# EAGLE board RPi_pico (EAGLE 7.7.0)

No outline drawn. Coordinates in mm, seen from the top.
Copper layers (1*16): Top 0.035mm / dielectric 1.5mm / Bottom 0.035mm
Design rules "default": minimum track width 10mil, minimum drill 24mil, track to track 8mil, track to pad 8mil, pad to pad 8mil, via to via 8mil, smd to smd 8mil, copper to edge 40mil, drill to drill 8mil, minimum pad ring 10mil, minimum via ring 8mil, stop-mask expansion 4mil, vias tented up to drill 0mil, thermal gap 10mil

## Footprints (pad centres in the part's own frame; a part is rotated, then mirrored left to right if it is on the bottom)
DIP40-W = drill 1 offset: 3V3_EN 19.38,41.94; 3V3OUT 19.38,39.4; !RESET 19.38,24.16; AREF 19.38,36.86; GND 1.6,44.48; GND@1 1.6,31.78; GND@2 1.6,19.08; GND@3 1.6,6.38; GND@4 19.38,6.38; GND@5 19.38,19.08; GND@6 19.38,31.78; GND@7 19.38,44.48; GND@DEBUG 10.49,1.3; GP0 1.6,49.56; GP1 1.6,47.02; GP2 1.6,41.94; GP3 1.6,39.4; GP4 1.6,36.86; GP5 1.6,34.32; GP6 1.6,29.24; GP7 1.6,26.7; GP8 1.6,24.16; GP9 1.6,21.62; GP10 1.6,16.54; GP11 1.6,14; GP12 1.6,11.46; GP13 1.6,8.92; GP14 1.6,3.84; GP15 1.6,1.3; GP16 19.38,1.3; GP17 19.38,3.84; GP18 19.38,8.92; GP19 19.38,11.46; GP20 19.38,14; GP21 19.38,16.54; GP22 19.38,21.62; GP26 19.38,26.7; GP27 19.38,29.24; GP28 19.38,34.32; SWCLK 7.95,1.3; SWDIO 13.03,1.3; VBUS 19.38,49.56; VSYS 19.38,47.02 | hole 2.1: 4.8,2; 16.2,2; 4.8,49.1; 16.1,49

## Placement (x,y rotation side)
E$1  [DIP40-W]  0,1.27 0 top

## Library data of the parts
E$1 = RPi_pico

## Text on the board
tPlace: vBus | vSys | GND | GND | 3v3out | ARef | A2 | GND | GND | A1 | A0 | !Reset | GND | GND | GND | GND
tNames: Boot
tplaceG: 0 | 1 | 2 | 3 | 4 | 5 | 28 | 6 | 27 | 7 | 26 | 8 | 9 | 22 | 10 | 21 | 11 | 20 | 12 | 19 | 13 | 18 | 14 | 17 | 15 | 16
tPlaceP: tx0 | rx0 | tx1 | rx1 | tx1 | rx1 | tx0 | rx0 | rx0 | tx0
tplaceB: sda0 | scl0 | sda1 | scl1 | sda0 | scl0 | sda1 | scl1 | scl1 | sda1 | sda0 | scl0 | sda1 | scl1 | sda0 | scl1 | scl0 | sda1 | sda1 | SCL0 | scl1 | sda0